# EAGLE board ChargerV1.0 (EAGLE 7.7.0)
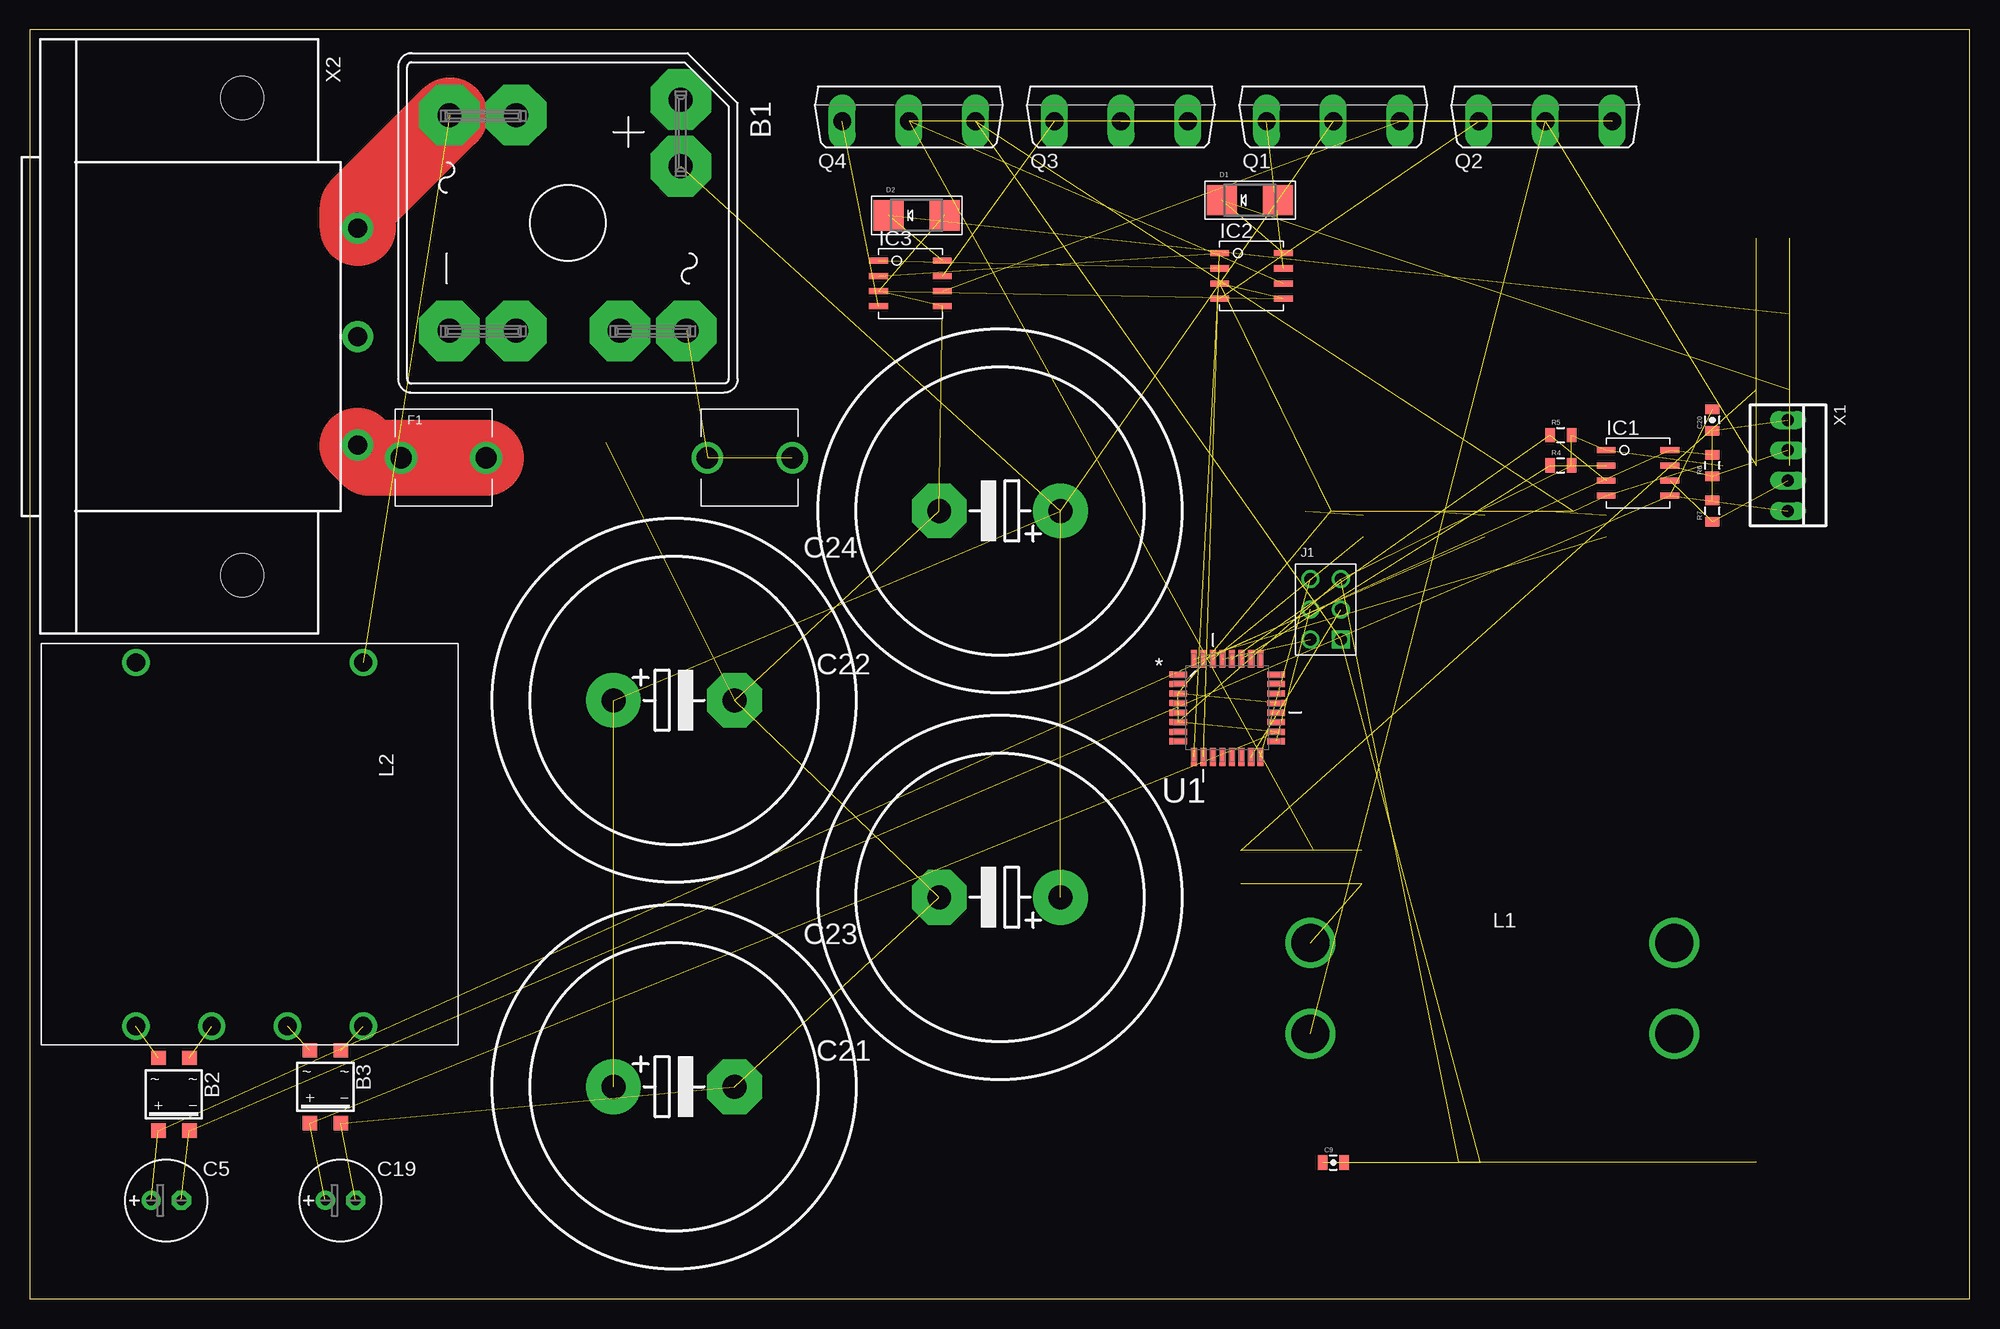
[diagram p0: board, top side]
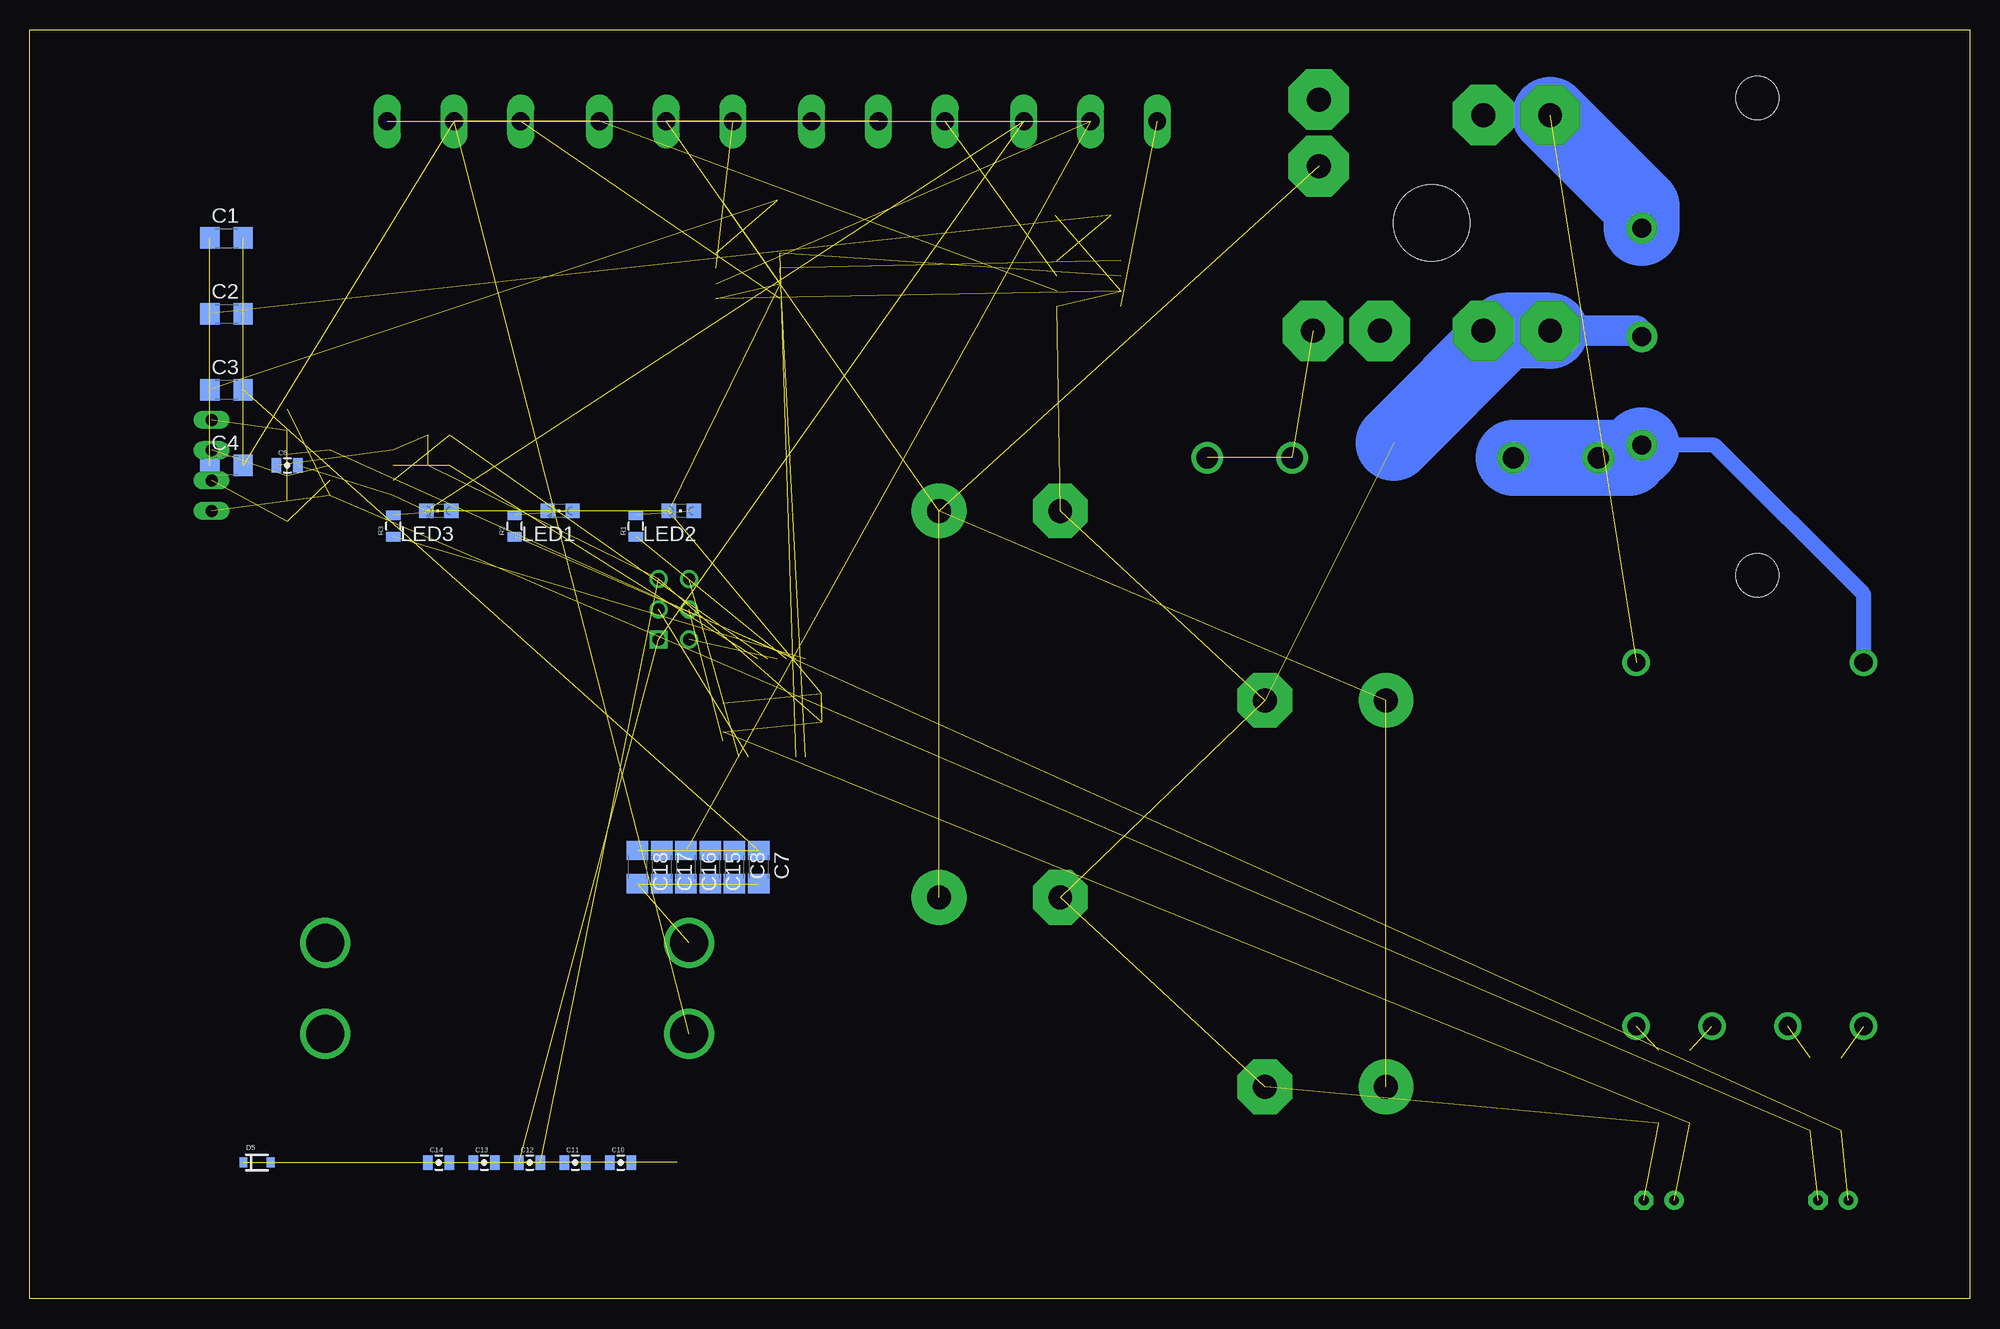
[diagram p1: board, bottom side, seen from below]

Size 162.54 x 106.35 mm. Coordinates in mm from the lower left corner, seen from the top.
Outline: 0,0 162.54,0 162.54,106.35 0,106.35 0,0
Copper layers (1*16): Top 0.035mm / dielectric 1.5mm / Bottom 0.035mm
Design rules "default": minimum track width 10mil, minimum drill 24mil, track to track 8mil, track to pad 8mil, pad to pad 8mil, via to via 8mil, smd to smd 8mil, copper to edge 40mil, drill to drill 8mil, minimum pad ring 10mil, minimum via ring 8mil, stop-mask expansion 4mil, vias tented up to drill 0mil, thermal gap 10mil

## Footprints (pad centres in the part's own frame; a part is rotated, then mirrored left to right if it is on the bottom)
B25A- = drill 2.007 pad 5.08 octagon: + -10.338,9.449; +1 -4.75,9.449; - 9.042,-4.343; -1 9.042,-9.931; AC1 9.042,4.343; AC1- 9.042,9.931; AC2 -9.042,-4.343; AC2- -9.042,-9.931 | hole 6.401: 0,0
SOIC-4 = smd 1.2 x 1.2: + 1.3,3.05; - -1.3,3.05; ~1 -1.3,-3.05; ~2 1.3,-3.05
C1206 = smd 1.6 x 1.8: 1 -1.4,0; 2 1.4,0
E2,5-7 = drill 0.813 pad 1.6: + -1.27,0 | drill 0.813 pad 1.6 octagon: - 1.27,0
0805-CAP = smd 0.8 x 1.2: 1 -0.9,0; 2 0.9,0
EB30D = drill 2.007 pad 4.597: + -5.08,0 | drill 2.007 pad 4.597 octagon: - 5.08,0
SMADIODE = smd 2.54 x 2.54: A 2.349,0; C -2.349,0
SOD-323 = smd 0.63 x 0.83: A 1.15,0; C -1.15,0
FUSE_HOLDER = drill 1.778: P$1 0,0; P$2 7.112,0; P$3 25.654,0; P$4 32.766,0
SOIC-8 = smd 1.575 x 0.508: P$1 0,3.81; P$2 0,2.54; P$3 0,1.27; P$4 0,0; P$5 5.334,0; P$6 5.334,1.27; P$7 5.334,2.54; P$8 5.334,3.81
2X3PIN_.1' = drill 0.991: P$1 -1.27,1.27; P$2 1.27,1.27; P$3 -1.27,-1.27; P$4 1.27,-1.27; P$5 -1.27,-3.81 | drill 0.991 square: P$6 1.27,-3.81
TRANSFORMER_TOR_CUSTOM = drill 3.175: P$1 -15.24,3.81; P$2 -15.24,-3.81; P$3 15.24,3.81; P$4 15.24,-3.81
TRANSFORMER_CUSTOM1 = drill 1.524: IN1 0,9.525; IN2 0,-9.525; OUT11 30.48,9.525; OUT12 30.48,3.175; OUT21 30.48,-3.175; OUT22 30.48,-9.525
CHIPLED_0805 = smd 1.2 x 1.2: A 0,-1.05; C 0,1.05
TO247BV = drill 1.499 long: D 0,-2.921; G -5.588,-2.921; S 5.588,-2.921
0805 = smd 0.8 x 1.2: 1 -0.9,0; 2 0.9,0
QFP80P900X900X120-32N = smd 1.473 x 0.508: 1 -4.115,2.794; 2 -4.115,2.007; 3 -4.115,1.194; 4 -4.115,0.406; 5 -4.115,-0.406; 6 -4.115,-1.194; 7 -4.115,-2.007; 8 -4.115,-2.794; 17 4.115,-2.794; 18 4.115,-2.007; 19 4.115,-1.194; 20 4.115,-0.406; 21 4.115,0.406; 22 4.115,1.194; 23 4.115,2.007; 24 4.115,2.794 | smd 0.508 x 1.473: 9 -2.794,-4.115; 10 -2.007,-4.115; 11 -1.194,-4.115; 12 -0.406,-4.115; 13 0.406,-4.115; 14 1.194,-4.115; 15 2.007,-4.115; 16 2.794,-4.115; 25 2.794,4.115; 26 2.007,4.115; 27 1.194,4.115; 28 0.406,4.115; 29 -0.406,4.115; 30 -1.194,4.115; 31 -2.007,4.115; 32 -2.794,4.115
22-23-2041 = drill 1 long: 1 -3.81,0; 2 -1.27,0; 3 1.27,0; 4 3.81,0
6ESRM-P = drill 1.6 pad 2.6: 1 -9.1,9.7; 2 0,9.7; 3 9.1,9.7 | hole 3.6: -20,0; 20,0

## Placement (x,y rotation side)
B1  [B25A-]  45.09,90.17 270 top
B2  MB1S  [SOIC-4]  12.06,17.14 180 top
B3  MB1S  [SOIC-4]  24.77,17.78 180 top
C1  .47uF  [C1206]  146.05,88.9 0 bottom
C2  .47uF  [C1206]  146.05,82.55 0 bottom
C3  .1uF  [C1206]  146.05,76.2 0 bottom
C4  .1uF  [C1206]  146.05,69.85 0 bottom
C5  [E2,5-7]  11.43,8.26 0 top
C6  .1uF  [0805-CAP]  140.97,69.85 0 bottom
C7  .47uF  [C1206]  101.47,36.2 270 bottom
C8  .47uF  [C1206]  103.5,36.2 270 bottom
C9  1uF  [0805-CAP]  109.22,11.43 0 top
C10  10uF  [0805-CAP]  113.03,11.43 0 bottom
C11  0.1uF  [0805-CAP]  116.84,11.43 0 bottom
C12  0.1uF  [0805-CAP]  120.65,11.43 0 bottom
C13  1uF  [0805-CAP]  124.46,11.43 0 bottom
C14  1uF  [0805-CAP]  128.27,11.43 0 bottom
C15  .47uF  [C1206]  105.54,36.2 270 bottom
C16  .47uF  [C1206]  107.57,36.2 270 bottom
C17  .47uF  [C1206]  109.6,36.2 270 bottom
C18  .47uF  [C1206]  111.63,36.2 270 bottom
C19  [E2,5-7]  26.04,8.26 0 top
C20  .1uF  [0805-CAP]  140.97,73.66 90 top
C21  2200uF  [EB30D]  81.28,33.66 180 top
C22  [EB30D]  81.28,66.04 180 top
C23  [EB30D]  53.98,17.78 0 top
C24  [EB30D]  53.98,50.16 0 top
D1  [SMADIODE]  102.23,92.08 0 top
D2  [SMADIODE]  74.3,90.81 0 top
D5  5.1V  [SOD-323]  143.51,11.43 0 bottom
F1  [FUSE_HOLDER]  31.11,70.48 0 top
IC1  SI8600_DUALCHANNELISO  [SOIC-8]  132.08,67.31 0 top
IC2  FAN7190  [SOIC-8]  99.69,83.82 0 top
IC3  FAN7190  [SOIC-8]  71.12,83.19 0 top
J1  ISPHEADER  [2X3PIN_.1']  108.58,59.05 0 top
L1  5:1  [TRANSFORMER_TOR_CUSTOM]  122.56,26.04 0 top
L2  24:1:1  [TRANSFORMER_CUSTOM1]  18.41,53.34 270 top
LED1  [CHIPLED_0805]  118.11,66.04 90 bottom
LED2  [CHIPLED_0805]  107.95,66.04 90 bottom
LED3  [CHIPLED_0805]  128.27,66.04 90 bottom
Q1  FDA69N25  [TO247BV]  109.22,101.6 0 top
Q2  FDA69N25  [TO247BV]  127,101.6 0 top
Q3  FDA69N25  [TO247BV]  91.44,101.6 0 top
Q4  FDA69N25  [TO247BV]  73.66,101.6 0 top
R1  1k  [0805]  111.76,64.77 90 bottom
R2  1k  [0805]  121.92,64.77 90 bottom
R3  1k  [0805]  132.08,64.77 90 bottom
R4  10k  [0805]  128.27,69.85 0 top
R5  10k  [0805]  128.27,72.39 0 top
R6  10k  [0805]  140.97,69.85 90 top
R7  10k  [0805]  140.97,66.04 90 top
U1  ATMEGA328P-AU  [QFP80P900X900X120-32N]  100.33,49.53 0 top
X1  22-23-2041  [22-23-2041]  147.32,69.85 270 top
X2  6ESRM-P  [6ESRM-P]  17.78,80.64 270 top

## Library data of the parts
B1-B3 = rectifier
C1-C4 C7 C8 C15-C18 = resistor
C5 C19 C21-C24 = rcl
C6 C10 C20 = SparkFun-Capacitors; PROD_ID: CAP-11330
C9 C11-C14 = SparkFun-Capacitors; PROD_ID: CAP-08469
D1 D2 LED1-LED3 = adafruit
D5 = SparkFun-DiscreteSemi; PROD_ID: DIO-12442
F1 IC1-IC3 J1 L1 L2 = lolomolo
Q1-Q4 = transistor-power
R1-R7 = SparkFun-Resistors; PROD_ID: RES-11622
U1 = Atmel_By_element14_Batch_1-00; MPN: ATMEGA328P-AU; OC_FARNELL: 1715486; OC_NEWARK: 14R4631; PACKAGE: TQFP-32; SUPPLIER: Atmel
X1 = con-molex; MF: MOLEX; MPN: 22-23-2041; OC_FARNELL: 1462920; OC_NEWARK: 38C0355
X2 = con-tycoelectronics; MF: TYCO ELECTRONICS; MPN: 6ESRM-P; OC_FARNELL: unknown; OC_NEWARK: 87F1821

## Nets
5V: B3.+ C6.1 C9.1 C10.1 C11.1 C12.2 C13.2 C14.1 C19.+ D5.C IC1.P$1 J1.P$2 R4.2 R5.2 U1.4 U1.6 U1.18
5V_SEC: B2.+ C5.+ C20.1 IC1.P$8 R6.2 R7.2 X1.1
ACRECT: B1.+1 C21.+ C22.+ C23.+ C24.+ Q1.D Q3.D
GND: B1.-1 B3.- C6.2 C9.2 C10.2 C11.2 C12.1 C13.1 C14.2 C19.- C21.- C22.- C23.- C24.- D1.A D2.A D5.A IC1.P$4 IC2.P$3 IC2.P$5 IC3.P$3 IC3.P$5 J1.P$6 LED1.C LED2.C LED3.C Q2.S Q4.S U1.3 U1.5 U1.21 X2.2
GND_SEC: B2.- C5.- C20.2 IC1.P$5 X1.4
HO1: IC2.P$7 Q1.G
HO2: IC3.P$7 Q3.G
HS_SEC: L1.P$4
HSO: C1.2 C3.2 C7.1 C8.1 C15.1 C16.1 C17.1 C18.1 IC2.P$6 Q3.S Q4.D
IN_HO1: IC2.P$2 IC3.P$1 U1.9
IN_HO2: IC2.P$1 IC3.P$2 U1.10
LEDG: R1.1 U1.30
LEDR: R3.1 U1.32
LEDY: R2.1 U1.31
LO1: IC2.P$4 Q2.G
LO2: IC3.P$4 Q4.G
LS_SEC: L1.P$3
LSO: C2.2 C4.2 IC3.P$6 L1.P$2 Q1.S Q2.D
MISO: J1.P$1 U1.16
MOSI: J1.P$4 U1.15
N$1: F1.P$1 F1.P$2 L2.IN2 X2.3
N$2: B1.AC1- F1.P$3 F1.P$4
N$3: B1.AC2- L2.IN1 X2.1
N$4: B3.~1 L2.OUT11
N$5: B3.~2 L2.OUT12
N$6: B2.~1 L2.OUT21
N$7: B2.~2 L2.OUT22
N$8: LED2.A R1.2
N$9: LED1.A R2.2
N$10: C1.1 C3.1 D1.C IC2.P$8
N$11: C2.1 C4.1 D2.C IC3.P$8
N$12: LED3.A R3.2
N$13: C7.2 C8.2 C15.2 C16.2 C17.2 C18.2 L1.P$1
RESET: J1.P$5 U1.29
SCK: J1.P$3 U1.17
SCL: IC1.P$3 R5.1 U1.28
SCL_SEC: IC1.P$6 R7.1 X1.3
SDA: IC1.P$2 R4.1 U1.27
SDA_SEC: IC1.P$7 R6.1 X1.2

## Tracks (layer width: path | path; a pad name or v marks a point on that pad's centre or on a via)
5V  (16 unrouted)
5V_SEC  (6 unrouted)
ACRECT  (6 unrouted)
GND  (30 unrouted)
  Bottom 2.54: X2.2 27.96,81.13 B1.-1
  Bottom 6.35: B1.-1 38.89,81.13 48.26,71.75
GND_SEC  (4 unrouted)
HO1  (1 unrouted)
HO2  (1 unrouted)
HSO  (10 unrouted)
IN_HO1  (2 unrouted)
IN_HO2  (2 unrouted)
LEDG  (1 unrouted)
LEDR  (1 unrouted)
LEDY  (1 unrouted)
LO1  (1 unrouted)
LO2  (1 unrouted)
LSO  (5 unrouted)
MISO  (1 unrouted)
MOSI  (1 unrouted)
N$1
  Top 6.35: 27.43,71.5 28.45,70.48 F1.P$2
  Bottom 1.27: L2.IN2 8.89,59.05 21.38,71.55 X2.3
  Bottom 6.35: F1.P$2 F1.P$1 28.54,70.48 X2.3
N$2  (2 unrouted)
N$3  (1 unrouted)
  Top 6.35: X2.1 27.48,91.49 35.18,99.19
  Bottom 6.35: X2.1 27.48,91.54 B1.AC2-
N$4  (1 unrouted)
N$5  (1 unrouted)
N$6  (1 unrouted)
N$7  (1 unrouted)
N$8  (1 unrouted)
N$9  (1 unrouted)
N$10  (3 unrouted)
N$11  (3 unrouted)
N$12  (1 unrouted)
N$13  (6 unrouted)
RESET  (1 unrouted)
SCK  (1 unrouted)
SCL  (2 unrouted)
SCL_SEC  (2 unrouted)
SDA  (2 unrouted)
SDA_SEC  (2 unrouted)